# Altium PCB PCB1-2.PcbDoc
Units mm, origin at the board's own origin, x right, y up, seen from the top; angles counter-clockwise.
Board outline 110 x 100 mm, 2 copper layers (Top Layer, Bottom Layer); 68 components, 73 nets, 354 pads, 0 vias.
Unrouted connection lines stored in the file: 232.
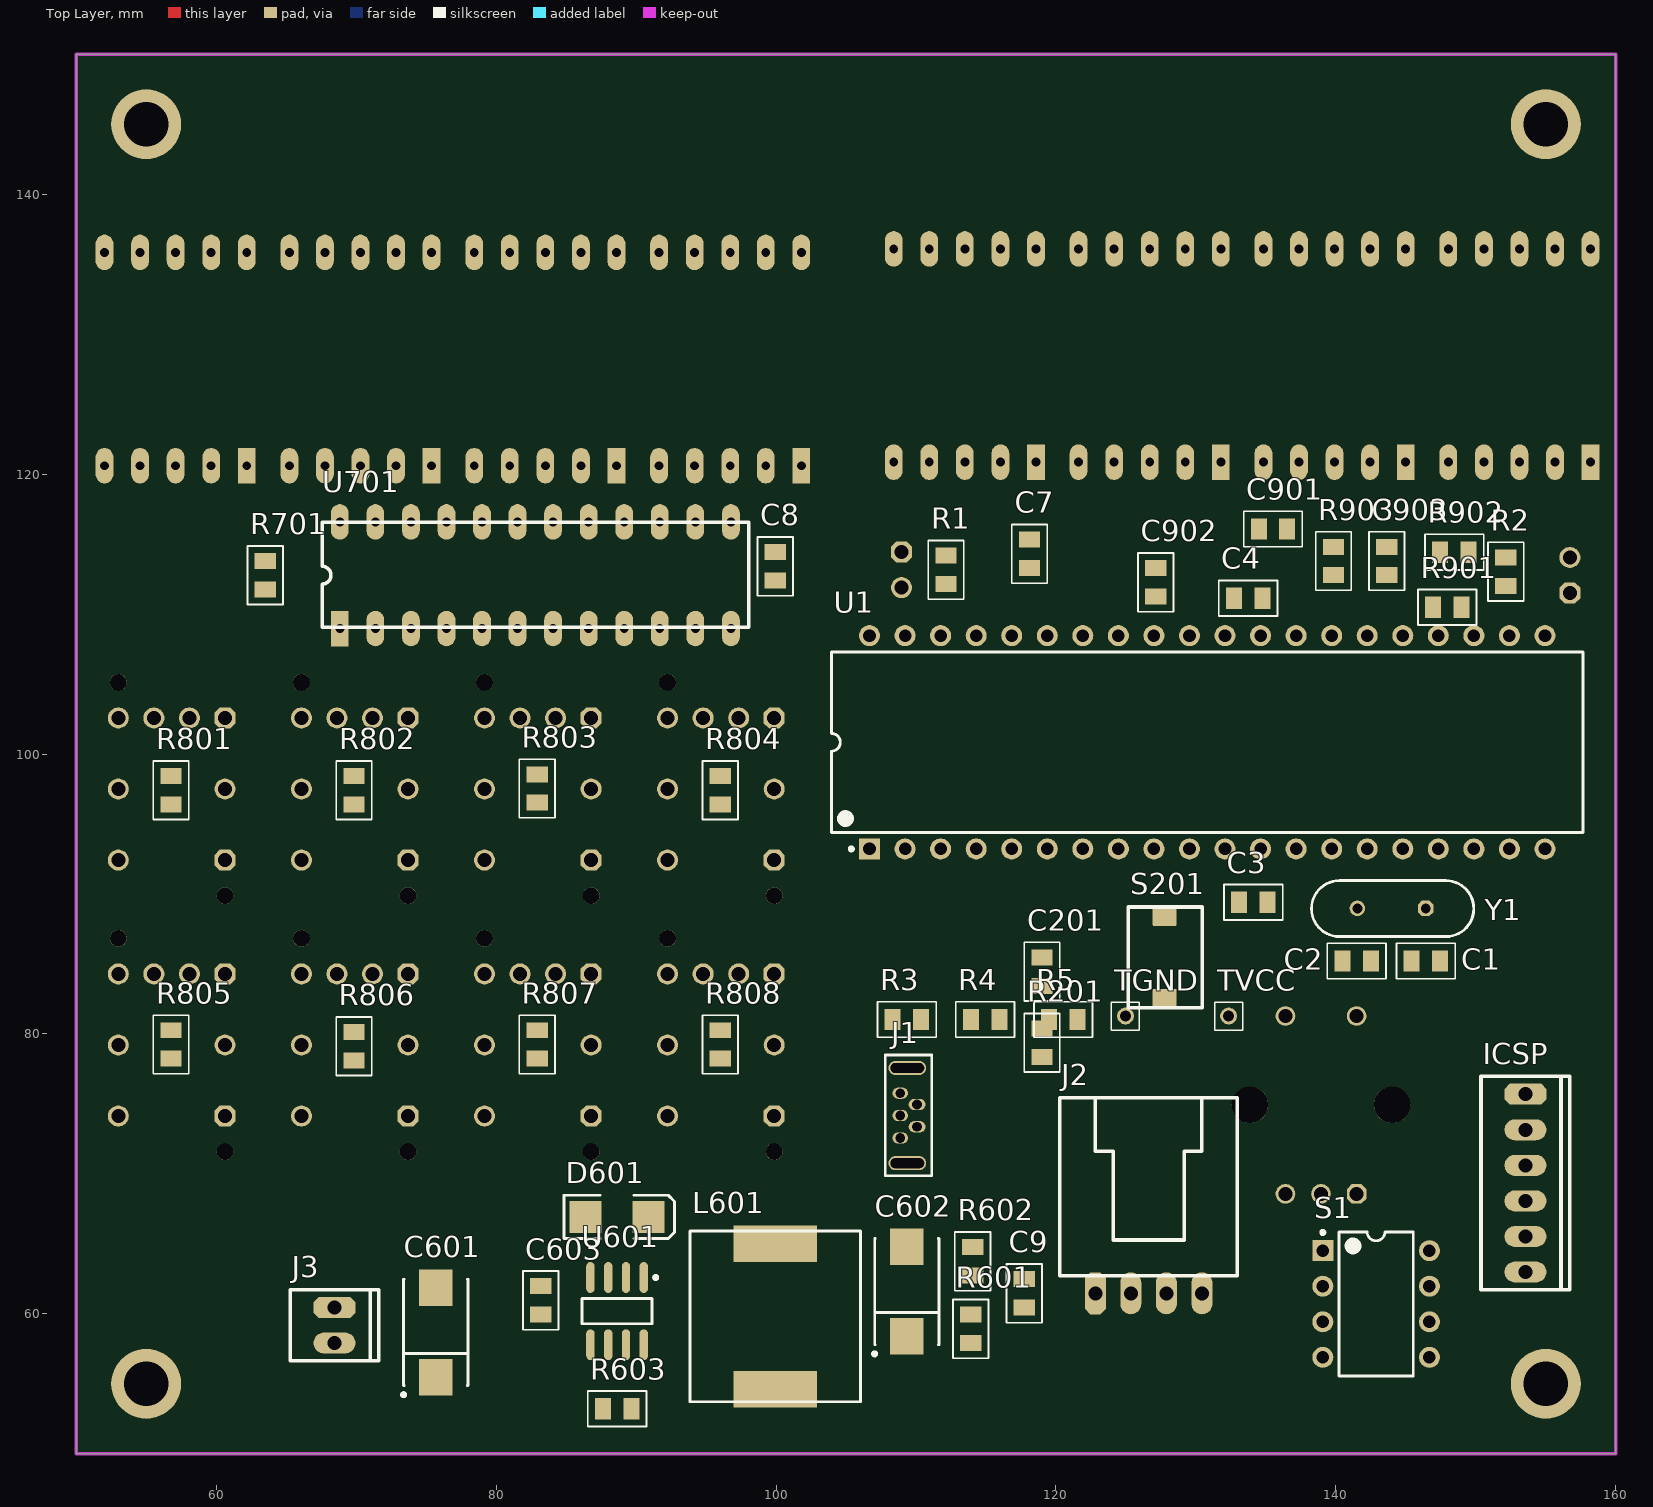
[diagram p0: Top Layer view]
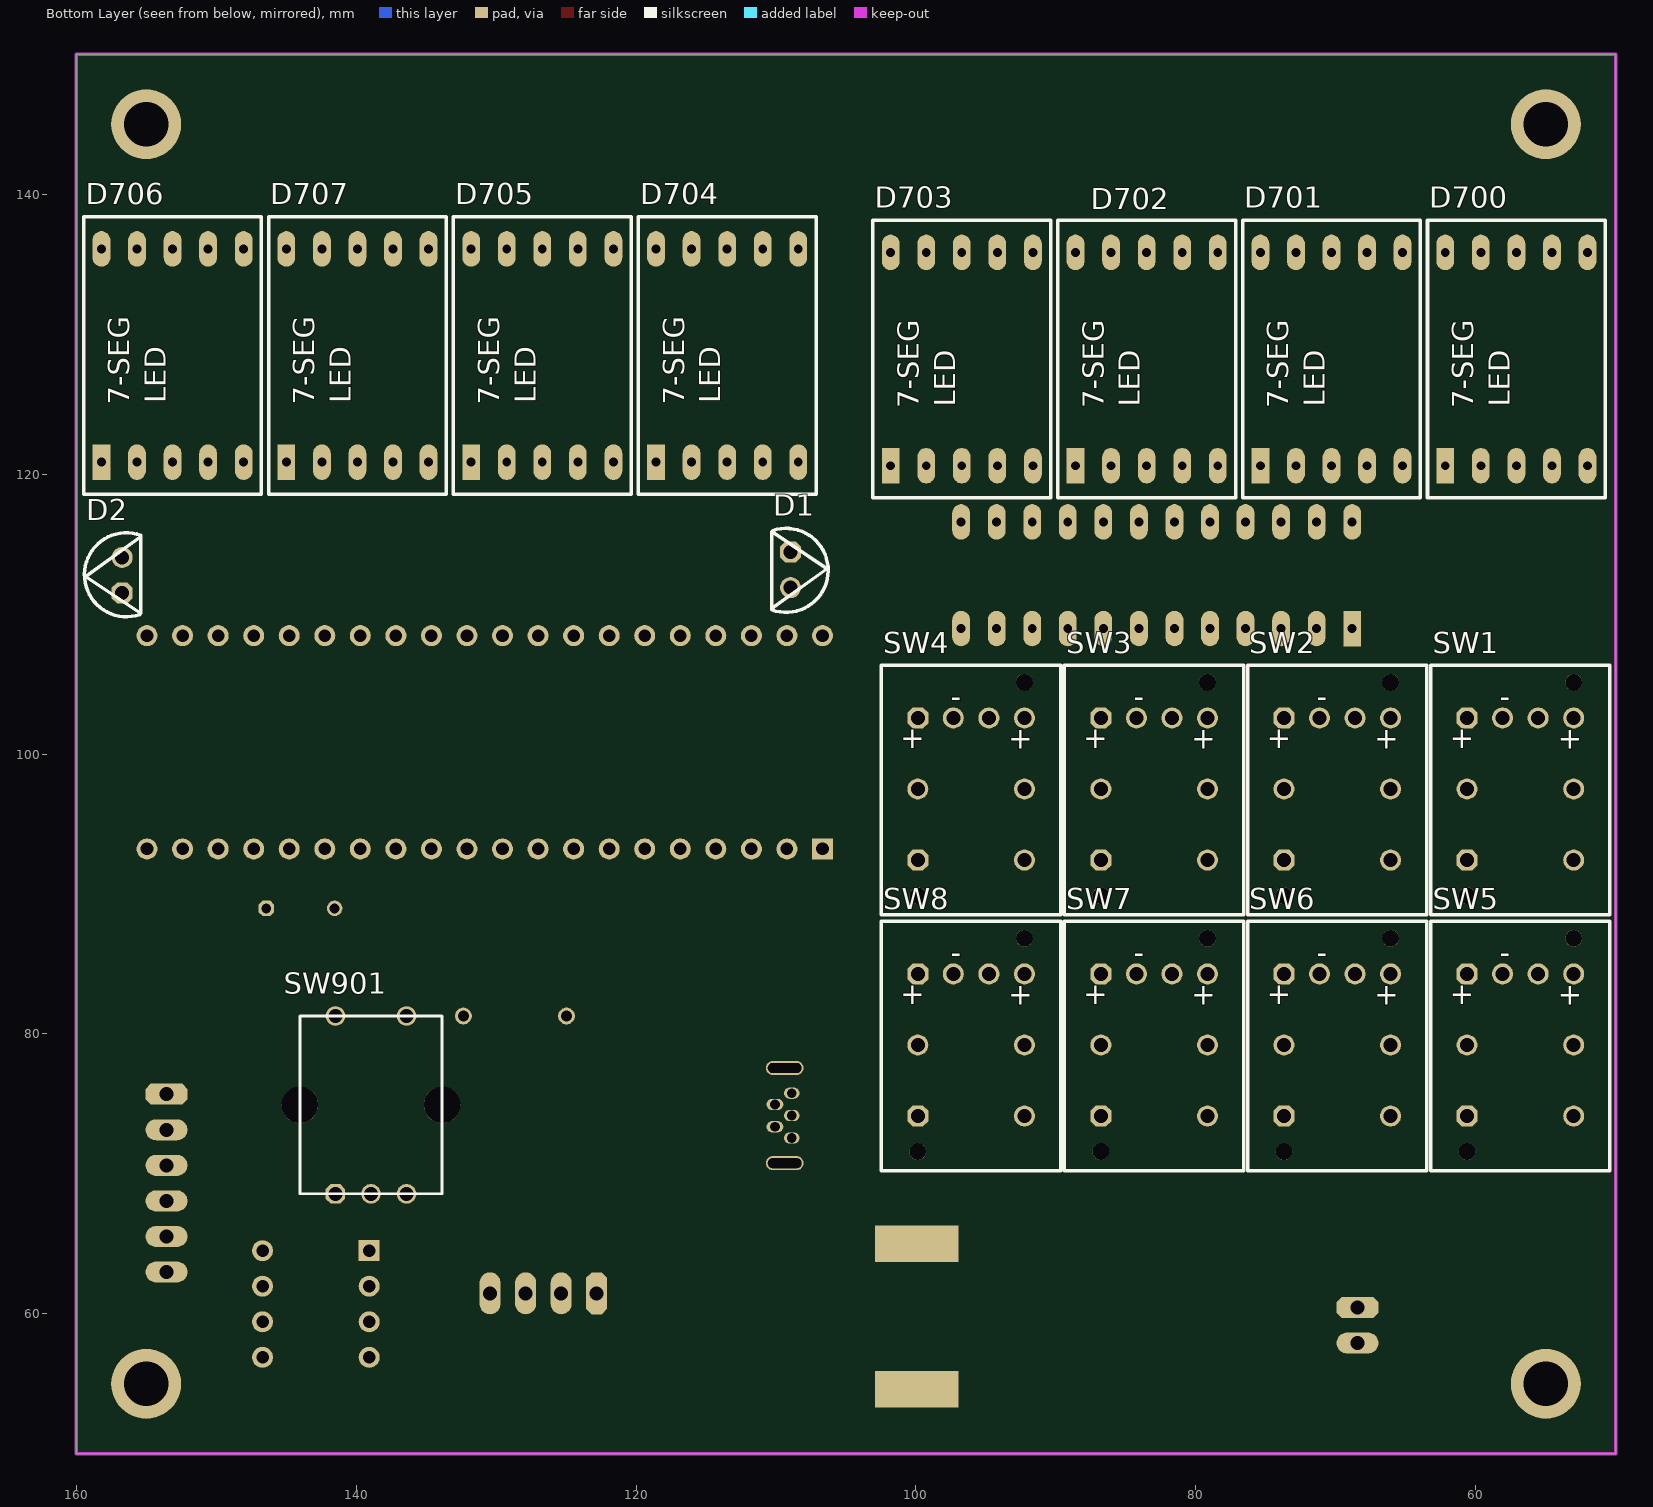
[diagram p1: Bottom Layer view, seen from below]

## Layer stack, top to bottom
Top Layer: signal copper 0.0356
Dielectric: dielectric 0.32, FR-4, Dk 4.8
Bottom Layer: signal copper 0.0356

## Board outline
50,50 160,50 160,150 50,150

## Design rules (kind name [scope] priority, off if disabled: settings)
Clearance [All] p1: gap=0.254
PolygonConnect [All] p1: connectstyle=Relief reliefconductorwidth=0.254 reliefentries=4 polygonreliefangle="90 Angle"
RoutingVias [All] p1: holewidth=0.711 width=1.27 viastyle="Through Hole" minholewidth=0.711 minwidth=1.27 maxholewidth=0.711 maxwidth=1.27
SilkscreenOverComponentPads [All] p1: minsilkscreentomaskgap=0.254
SolderMaskExpansion [All] p1: expansion=0.102
Width [All] p1: maxlimit=0.254 minlimit=0.254 preferedwidth=0.254
27 further rules are at their usual default settings.

## Classes and differential pairs
component class PSU: C601 C602 C603 D601 J3 L601 R601 R602 R603 U601
component class "Digitast Keyboard": R801 R802 R803 R804 R805 R806 R807 R808 SW1 SW2 SW3 SW4 SW5 SW6 SW7 SW8
component class Display: D700 D701 D702 D703 D704 D705 D706 D707 R701 U701
component class Main: C1 C2 C3 C4 C7 C8 C9 D1 D2 J1 J2 R1 R2 R3 R4 R5 S1 TGND TVCC U1 Y1
component class "PIC Reset": C201 ICSP R201 S201
component class "Rotary Encoder": C901 C902 C903 R901 R902 R903 SW901

## Components (designator, comment, footprint, x,y, rotation, side; value= is the part's Value field where it differs from the comment)
C1 "Cap Semi" "RCL 0805" 146.431,85.217 r0 top
C2 "Cap Semi" "RCL 0805" 141.478,85.217 r0 top
C3 "Cap Semi" "RCL 0805" 134.112,89.408 r180 top
C4 "Cap Semi" "RCL 0805" 133.731,111.125 r0 top
C7 "Cap Semi" "RCL 0805" 118.11,114.3 r90 top
C8 "Cap Semi" "RCL 0805" 99.949,113.411 r90 top
C9 "Cap Semi" "RCL 0805" 117.729,61.468 r270 top
C201 "Cap Semi" "RCL 0805" 118.999,84.455 r270 top
C601 "Cap Pol1" Tantalum_D 75.692,58.674 r90 top
C602 "Cap Pol1" Tantalum_D 109.347,61.595 r90 top
C603 "Cap Semi" "RCL 0805" 83.185,60.96 r270 top
C901 "Cap Semi" "RCL 0805" 135.509,116.078 r180 top
C902 "Cap Semi" "RCL 0805" 127.127,112.268 r270 top
C903 "Cap Semi" "RCL 0805" 143.637,113.792 r90 top
D1 "Forward" "LED 5MM Triangular" 111.506,111.887 r180 bottom
D2 "Backward" "LED 5MM Triangular" 154.178,114.046 r0 bottom
D601 "D Schottky" DSO-C2/X2.3 88.646,66.929 r0 top
D700 "7-SEG" 7SEG-SC56 57.183,128.397 r180 bottom
D701 "7-SEG" 7SEG-SC56 70.391,128.397 r180 bottom
D702 "7-SEG" 7SEG-SC56 83.599,128.397 r180 bottom
D703 "7-SEG" 7SEG-SC56 96.807,128.397 r180 bottom
D704 "7-SEG" 7SEG-SC56 113.571,128.651 r180 bottom
D705 "7-SEG" 7SEG-SC56 126.779,128.651 r180 bottom
D706 "7-SEG" 7SEG-SC56 153.195,128.651 r180 bottom
D707 "7-SEG" 7SEG-SC56 139.987,128.651 r180 bottom
ICSP "Header 6" "MOLEX 22-23-2061" 153.543,69.342 r270 top
J1 "USB" "USB B-Mini Vertical" 108.077,78.867 r270 top
J2 "Serial" "PC Audio Connector" 126.619,61.468 r0 top
J3 "Power (5-28V)" "MOLEX 22-23-2021" 68.453,59.182 r270 top
L601 "Inductor" "Fastron PIS4728" 106.045,53.721 r90 top
R1 "Res3" "RCL 0805" 112.141,113.157 r270 top
R2 "Res3" "RCL 0805" 152.146,113.03 r270 top
R3 "Res3" "RCL 0805" 109.347,81.026 r0 top
R4 "Res3" "RCL 0805" 114.935,81.026 r0 top
R5 "Res3" "RCL 0805" 120.523,81.026 r0 top
R201 "Res3" "RCL 0805" 118.999,79.375 r270 top
R601 "Res3" "RCL 0805" 113.919,58.928 r270 top
R602 "Res3" "RCL 0805" 114.046,63.754 r270 top
R603 "Res3" "RCL 0805" 88.646,53.213 r180 top
R701 "Res3" "RCL 0805" 63.5,112.776 r90 top
R801 "Res3" "RCL 0805" 56.769,97.409 r270 top
R802 "Res3" "RCL 0805" 69.85,97.409 r270 top
R803 "Res3" "RCL 0805" 82.931,97.536 r270 top
R804 "Res3" "RCL 0805" 96.012,97.409 r270 top
R805 "Res3" "RCL 0805" 56.769,79.248 r270 top
R806 "Res3" "RCL 0805" 69.85,79.121 r270 top
R807 "Res3" "RCL 0805" 82.931,79.248 r270 top
R808 "Res3" "RCL 0805" 96.012,79.248 r270 top
R901 "Res3" "RCL 0805" 147.955,110.49 r0 top
R902 "Res3" "RCL 0805" 148.463,114.427 r0 top
R903 "Res3" "RCL 0805" 139.827,113.792 r90 top
S1 "SW-DIP4" DIP-8 142.875,60.706 r0 top
S201 "SW-PB" "Square SMD Switch 01" 127.762,85.471 r90 top
SW1 "DIGITAST SERL" "DIGITAST SERL" 63.229,88.519 r180 bottom
SW2 "DIGITAST SERL" "DIGITAST SERL" 76.31,88.519 r180 bottom
SW3 "DIGITAST SERL" "DIGITAST SERL" 89.391,88.519 r180 bottom
SW4 "DIGITAST SERL" "DIGITAST SERL" 102.472,88.519 r180 bottom
SW5 "DIGITAST SERL" "DIGITAST SERL" 63.229,70.231 r180 bottom
SW6 "DIGITAST SERL" "DIGITAST SERL" 76.31,70.231 r180 bottom
SW7 "DIGITAST SERL" "DIGITAST SERL" 89.391,70.231 r180 bottom
SW8 "DIGITAST SERL" "DIGITAST SERL" 102.472,70.231 r180 bottom
SW901 "Rotary Encoder" "Encoder 1" 144.018,66.04 r180 bottom
TGND "TESTPOINT" "TEST POINT 1" 124.968,81.28 r90 top
TVCC "TESTPOINT" "TEST POINT 1" 132.334,81.28 r90 top
U1 "PIC18F4550-I/P" PDIP600-P40 130.81,100.838 r90 top
U601 "MC34063AD" 751-02_N 88.646,60.198 r270 top
U701 "MAX7219CNG" DIP24 68.834,108.966 r90 top
Y1 "XTAL" HC49U 138.557,93.853 r270 top

## Footprints (in the part's own frame and the unit in brackets; to place one, negate y for a bottom-side part, rotate by r counter-clockwise, add the part's x,y. Pads: shape width x height; smd on the part's side, far side on the other; paste and mask are expansions set on the pad)
7SEG-SC56 [mm]
  rect 1.27x2.54 hole 0.635: 1(-5,-7.8)
  oval 1.27x2.54 hole 0.635: 2(-2.46,-7.8) 3(0.08,-7.8) 3(0.08,7.44) 4(2.62,-7.8) 5(5.16,-7.8) 6(5.16,7.44) 7(2.62,7.44) 9(-2.46,7.44) 10(-5,7.44)
  silkscreen extent -6.27,-10.1 6.43,9.75, body extent -6.4,-10.23 6.56,9.88, height 8
751-02_N [mm] "SOIC, 8-Leads, Body 4.9x3.9mm, Pitch 1.27mm, IPC Medium Density"
  oval 2.2x0.6 smd: 1(-2.4,1.905) 2(-2.4,0.635) 3(-2.4,-0.635) 4(-2.4,-1.905) 5(2.4,-1.905) 6(2.4,-0.635) 7(2.4,0.635) 8(2.4,1.905)
  silkscreen extent -2.52,-2.5 0.9,2.88, body extent -1.95,-2.45 1.95,2.45, height 1.75
"DIGITAST SERL" [mm]
  round 1.5 hole 1: 0(2.6,8.98) 0(10.22,8.98) 2(10.22,3.9) 4(5.14,14.06) 5(7.68,14.06) 6(10.22,14.06)
  oct 1.5x1.5 hole 1: 1(2.6,3.9) 3(2.6,14.06)
  round 1.2 hole 1.2 unplated: ""(2.6,1.36) ""(10.22,16.6)
  silkscreen extent 0,0 12.81,17.81, body extent -0.05,-0.03 12.75,17.78, height 14.3
DIP24 [mm]
  rect 2.54x1.27 hole 0.635: 1(0,0)
  oval 2.54x1.27 hole 0.635: 2(0,-2.54) 3(0,-5.08) 4(0,-7.62) 5(0,-10.16) 6(0,-12.7) 7(0,-15.24) 8(0,-17.78) 9(0,-20.32) 10(0,-22.86) 11(0,-25.4) 12(0,-27.94) 13(7.62,-27.94) 14(7.62,-25.4) 15(7.62,-22.86) 16(7.62,-20.32) 17(7.62,-17.78) 18(7.62,-15.24) 19(7.62,-12.7) 20(7.62,-10.16) 21(7.62,-7.62) 22(7.62,-5.08) 23(7.62,-2.54) 24(7.62,0)
  silkscreen extent 0.1,-29.21 7.6,1.27, body extent 0.1,-29.2 7.7,1.5, height 3.05
DIP-8 [mm] "DIP; 8 Leads; Row Spacing 7.62 mm; Pitch 2.54 mm"
  rect 1.5x1.5 hole 0.9: 1(-3.81,3.81)
  round 1.5 hole 0.9: 2(-3.81,1.27) 3(-3.81,-1.27) 4(-3.81,-3.81) 5(3.81,-3.81) 6(3.81,-1.27) 7(3.81,1.27) 8(3.81,3.81)
  silkscreen extent -3.93,-5.15 2.65,5.23, body extent -3.6,-5.15 3.6,5.15, height 5.08
DSO-C2/X2.3 [mm] "DO-214-AA/SMB; 2 C-Bend Leads; Body 5.3 x 3.6 mm, inc. leads (LxW)"
  rect 2.3x2.3 smd: 1(-2.25,0) 2(2.25,0)
  silkscreen extent -3.8,-1.55 4.1,1.55
"Encoder 1" [mm]
  oct 1.4x1.4 hole 1: 1(2.54,2.54)
  round 1.4 hole 1: 2(5.08,2.54) 3(7.62,2.54) 4(7.62,15.24) 5(2.54,15.24)
  round 2.6 hole 2.6 unplated: ""(0,8.89) ""(10.16,8.89)
  silkscreen extent 0,2.54 10.16,15.24, body extent -0.1,2.44 10.26,15.34, height 26
"Fastron PIS4728" [mm] "Inductor"
  rect 2.6x6 all layers, no hole: 0(0.9,6.1) 1(11.3,6.1)
  silkscreen extent 0,0 12.2,12.2, body extent 0,0 12.2,12.2, height 8
HC49U [mm]
  oct 1.1x1.1 hole 0.7: 1(4.88,7.86)
  round 1.1 hole 0.7: 2(4.88,2.98)
  silkscreen extent 2.9,-0.3 6.9,11.3, body extent 2.89,-0.31 6.91,11.31, height 3.5
"LED 5MM Triangular" [mm]
  oct 1.5x1.5 hole 1: 1(2.54,2.54)
  round 1.5 hole 1: 2(2.54,0)
  silkscreen extent 1.2,-1.76 5.23,4.23, body extent 1.2,-1.5 5.15,4, height 10
"MOLEX 22-23-2021" [mm] "2.54mm (.100\") Pitch KK® Solid Header, Vertical, with Friction Lock, 2 Circuits, Tin (Sn) Plating"
  oct 1.5x3 hole 1: 1(-1.27,0)
  oval 1.5x3 hole 1: 2(1.27,0)
  silkscreen extent -2.54,-3.18 2.54,3.18, body extent -2.54,-3.18 2.54,3.18, height 10.66
"MOLEX 22-23-2061" [mm] "2.54mm (.100\") Pitch KK® Solid Header, Vertical, with Friction Lock, 2 Circuits, Tin (Sn) Plating"
  oct 1.5x3 hole 1: 1(-6.35,0)
  oval 1.5x3 hole 1: 2(-3.81,0) 3(-1.27,0) 4(1.27,0) 5(3.81,0) 6(6.35,0)
  silkscreen extent -7.62,-3.18 7.62,3.18, body extent -7.62,-3.18 7.62,3.18, height 10.66
"PC Audio Connector" [mm]
  oct 1.5x3 hole 1: 1(-3.81,0)
  oval 1.5x3 hole 1: 2(-1.27,0) 3(1.27,0) 4(3.81,0)
  silkscreen extent -6.35,1.27 6.35,13.97, body extent -6.35,1.27 6.35,13.97, height 4
PDIP600-P40 [mm] "DIP, 40-Leads, Row Spacing 15.24mm, Pitch 2.54mm, Body 51.8x13.5mm"
  rect 1.5x1.5 hole 0.9: 1(-7.62,24.13)
  round 1.5 hole 0.9: 2(-7.62,21.59) 3(-7.62,19.05) 4(-7.62,16.51) 5(-7.62,13.97) 6(-7.62,11.43) 7(-7.62,8.89) 8(-7.62,6.35) 9(-7.62,3.81) 10(-7.62,1.27) 11(-7.62,-1.27) 12(-7.62,-3.81) 13(-7.62,-6.35) 14(-7.62,-8.89) 15(-7.62,-11.43) 16(-7.62,-13.97) 17(-7.62,-16.51) 18(-7.62,-19.05) 19(-7.62,-21.59) 20(-7.62,-24.13) 21(7.62,-24.13) 22(7.62,-21.59) 23(7.62,-19.05) 24(7.62,-16.51) 25(7.62,-13.97) 26(7.62,-11.43) 27(7.62,-8.89) 28(7.62,-6.35) 29(7.62,-3.81) 30(7.62,-1.27) 31(7.62,1.27) 32(7.62,3.81) 33(7.62,6.35) 34(7.62,8.89) 35(7.62,11.43) 36(7.62,13.97) 37(7.62,16.51) 38(7.62,19.05) 39(7.62,21.59) 40(7.62,24.13)
  silkscreen extent -7.74,-26.85 6.45,26.85, body extent -7.3,-26.85 7.3,26.85, height 6.35
"RCL 0805" [mil]
  rect 45x60 smd: 1(-40,0) 2(40,0)
  silkscreen extent -82,-50 82,50, body extent -50,-30 50,30, height 31
"Square SMD Switch 01" [mm]
  rrect10% 1.3x1.7 smd: 1(-2.9,0) 2(2.9,0)
  silkscreen extent -3.6,-2.7 3.6,2.6, body extent -3.3,-2.5 3.3,2.4, height 4
Tantalum_D [mm] "Capacitor, SM Tantalum; Body 7.3 x 4.3 mm (LxW typ)"
  rect 2.6x2.4 smd: 1(-3.2,0) 2(3.2,0)
  silkscreen extent -4.57,-2.3 3.8,2.42, body extent -3.8,-2.3 3.8,2.2, height 4
"TEST POINT 1" [mm]
  round 1.2 hole 0.8: 1(0,0)
  silkscreen extent -1,-1 1,1
"USB B-Mini Vertical" [mm] "USB B-Mini / Assmann von Reichelt"
  oval 0.8x1.1 hole 0.7: 1(6.3,0.8) 3(4.7,0.8) 5(3.1,0.8)
  oval 0.8x1.2 hole 0.7: 2(5.5,2) 4(3.9,2)
  oval 1x2.7 hole 0.7 slot 2.4 at 90 deg: 6(1.3,1.3) 6(8.1,1.3)
  silkscreen extent 0.38,-0.28 8.99,3.05, body extent 0.43,-0.25 9.04,3.05, height 8

## Part data
C1 C2 C3 C4 C7 C8 C9 C201 C603 C901 C902 C903: "Capacitor (Semiconductor SIM Model)"
C601 C602: "Polarized Capacitor (Radial)"
D1 D2: library part LED0, "Typical INFRARED GaAs LED"
D601: "Schottky Diode"
ICSP: "Header, 6-Pin"
J1: library part 1-353576-1, "USB 1.1, Right Angle, SMT, A Type, Receptacle, 4 Position, White"
J2: library part "Header 4", "Header, 4-Pin"
J3: library part "Header 2", "Header, 2-Pin"
R1 R2 R3 R4 R5 R201 R601 R602 R603 R701 R801 R802 R803 R804 R805 R806 R807 R808 R901 R902 R903: "Resistor"
S1: "DIP Switch"
S201: "Switch"
U1: "High Performance, Enhanced Flash, USB Microcontroller with nanoWatt Technology, 32K Flash, 40-Pin PDIP, Industrial Temperature Range"
U601: "DC-to-DC Converter Control Circuit"
U701: "Serially Interfaced, 8-Digit LED Display Driver"
Y1: "Crystal Oscillator"

## Free pads (board coordinates)
  round 5 hole 3.2: 1(55,55) 2(55,145) 3(155,145) 4(155,55)

## Nets (pads, with @x,y where several pads share a name; then routed paths per layer and width w, separated by ;. In a path a pad name is that pad's centre, name@x,y a point inside that pad or via, vN(x,y) a via of type N, cw(c..) or ccw(c..) an arc to the next point about the centre after c; other vN are vias at no path point)
BTN: C901.2 R901.1 SW901.5 U1.35
CFG1: R5.2 S1.1 U1.15
CFG2: R4.2 S1.2 U1.16
CFG3: R3.2 S1.3 U1.17
CHA: C903.2 R903.1 SW901.1 U1.33
CHB: C902.2 R902.1 SW901.3 U1.34
CLK: U1.38 U701.13
COL1: SW1.1 SW5.1 U1.2
COL2: SW2.1 SW6.1 U1.3
COL3: SW3.1 SW7.1 U1.4
COL4: SW4.1 SW8.1 U1.5
DIG0: D700.3 U701.2
DIG1: D701.3 U701.11
DIG2: D702.3 U701.6
DIG3: D703.3 U701.7
DIG4: D704.3 U701.3
DIG5: D705.3 U701.10
DIG6: D706.3 U701.5
DIG7: D707.3 U701.8
DIN: U1.36 U701.1
DM: J1.3 U1.24
DOUT: U701.24
DP: J1.2 U1.23
GND: C1.2 C2.1 C3.1 C4.1 C7.1 C8.1 C9.1 C201.1 C601.2 C602.2 C603.1 C901.1 C902.1 C903.1 D601.1 ICSP.3 J1.4 J1.5 J1.6 J2.2 J3.1 R602.1 R701.1 S1.6 S1.7 S1.8 S201.1 SW901.2 SW901.4 TGND.1 U1.12 U1.31 U601.4 U701.4 U701.9
INT: J2.4 U1.10
LED1: SW1.4 U1.19
LED2: SW2.4 U1.20
LED3: SW3.4 U1.21
LED4: SW4.4 U1.22
LED5: SW5.4 U1.27
LED6: SW6.4 U1.28
LED7: SW7.4 U1.29
LED8: SW8.4 U1.30
LEDFWD: R1.1 U1.8
LEDREW: R2.2 U1.9
LOAD: U1.37 U701.12
MCLR: C201.2 ICSP.1 R201.1 S201.2 U1.1
NetC4_2: C4.2 U1.18
NetC603_2: C603.2 U601.3
NetD1_2: D1.2 R1.2
NetD2_2: D2.2 R2.1
NetD601_2: D601.2 L601.1 U601.2
NetR601_1: R601.1 R602.2 U601.5
NetR603_1: R603.1 U601.1 U601.7 U601.8
NetR701_2: R701.2 U701.18
NetR801_1: R801.1 SW1.5
NetR802_1: R802.1 SW2.5
NetR803_1: R803.1 SW3.5
NetR804_1: R804.1 SW4.5
NetR805_1: R805.1 SW5.5
NetR806_1: R806.1 SW6.5
NetR807_1: R807.1 SW7.5
NetR808_1: R808.1 SW8.5
OSC1: C2.2 U1.13 Y1.2
OSC2: C1.1 U1.14 Y1.1
PGC: ICSP.5 U1.39
PGD: ICSP.4 U1.40
PGM: ICSP.6
ROW1: SW1.0 SW2.0 SW3.0 SW4.0 U1.6
ROW2: SW5.0 SW6.0 SW7.0 SW8.0 U1.7
RX: J2.3 U1.26
SEGA: D700.7 D701.7 D702.7 D703.7 D704.7 D705.7 D706.7 D707.7 U701.14
SEGB: D700.6 D701.6 D702.6 D703.6 D704.6 D705.6 D706.6 D707.6 U701.16
SEGC: D700.4 D701.4 D702.4 D703.4 D704.4 D705.4 D706.4 D707.4 U701.20
SEGD: D700.2 D701.2 D702.2 D703.2 D704.2 D705.2 D706.2 D707.2 U701.23
SEGDP: D700.5 D701.5 D702.5 D703.5 D704.5 D705.5 D706.5 D707.5 U701.22
SEGE: D700.1 D701.1 D702.1 D703.1 D704.1 D705.1 D706.1 D707.1 U701.21
SEGF: D700.9 D701.9 D702.9 D703.9 D704.9 D705.9 D706.9 D707.9 U701.15
SEGG: D700.10 D701.10 D702.10 D703.10 D704.10 D705.10 D706.10 D707.10 U701.17
TX: J2.1 U1.25
VBUS: J1.1
VCC: C3.2 C7.2 C8.2 C9.2 C602.1 D1.1 D2.1 ICSP.2 R3.1 R4.1 R5.1 R201.2 R601.2 R801.2 R802.2 R803.2 R804.2 R805.2 R806.2 R807.2 R808.2 R901.2 R902.2 R903.2 TVCC.1 U1.11 U1.32 U701.19
VIN: C601.1 J3.2 R603.2 U601.6
pads on no net: L601.0 S1.4 S1.5 SW1. SW1.2 SW1.3 SW1.6 SW2. SW2.2 SW2.3 SW2.6 SW3. SW3.2 SW3.3 SW3.6 SW4. SW4.2 SW4.3 SW4.6 SW5. SW5.2 SW5.3 SW5.6 SW6. SW6.2 SW6.3 SW6.6 SW7. SW7.2 SW7.3 SW7.6 SW8. SW8.2 SW8.3 SW8.6 SW901.

## Keep-outs
Keep-Out Layer:
  the board outline again, w0.254

## Text inside footprints (layer, text, board x,y; h text height)
D700: Bottom Overlay "LED" at 57.583,124.797 h1.52 r270
D701: Bottom Overlay "LED" at 70.791,124.797 h1.52 r270
D702: Bottom Overlay "LED" at 83.999,124.797 h1.52 r270
D703: Bottom Overlay "LED" at 97.207,124.797 h1.52 r270
D704: Bottom Overlay "LED" at 113.971,125.051 h1.52 r270
D705: Bottom Overlay "LED" at 127.179,125.051 h1.52 r270
D706: Bottom Overlay "LED" at 153.595,125.051 h1.52 r270
D707: Bottom Overlay "LED" at 140.387,125.051 h1.52 r270
SW1: Bottom Overlay "+" at 52.409,101.699 h1.52 r180; Bottom Overlay "+" at 60.119,101.729 h1.52 r180; Bottom Overlay "-" at 57.529,104.529 h1.52 r180
SW2: Bottom Overlay "-" at 70.61,104.529 h1.52 r180; Bottom Overlay "+" at 73.2,101.729 h1.52 r180; Bottom Overlay "+" at 65.49,101.699 h1.52 r180
SW3: Bottom Overlay "-" at 83.691,104.529 h1.52 r180; Bottom Overlay "+" at 86.281,101.729 h1.52 r180; Bottom Overlay "+" at 78.571,101.699 h1.52 r180
SW4: Bottom Overlay "-" at 96.772,104.529 h1.52 r180; Bottom Overlay "+" at 99.362,101.729 h1.52 r180; Bottom Overlay "+" at 91.652,101.699 h1.52 r180
SW5: Bottom Overlay "-" at 57.529,86.241 h1.52 r180; Bottom Overlay "+" at 60.119,83.441 h1.52 r180; Bottom Overlay "+" at 52.409,83.411 h1.52 r180
SW6: Bottom Overlay "-" at 70.61,86.241 h1.52 r180; Bottom Overlay "+" at 73.2,83.441 h1.52 r180; Bottom Overlay "+" at 65.49,83.411 h1.52 r180
SW7: Bottom Overlay "-" at 83.691,86.241 h1.52 r180; Bottom Overlay "+" at 86.281,83.441 h1.52 r180; Bottom Overlay "+" at 78.571,83.411 h1.52 r180
SW8: Bottom Overlay "-" at 96.772,86.241 h1.52 r180; Bottom Overlay "+" at 99.362,83.441 h1.52 r180; Bottom Overlay "+" at 91.652,83.411 h1.52 r180